# Altium PCB IP Camera v0.0.1.PcbDoc
Units mm, origin at the board's own origin, x right, y up, seen from the top; angles counter-clockwise.
Board outline 50 x 50 mm, 4 copper layers (Top Layer, Internal 1, Internal 2, Bottom Layer), stack 1.5 mm thick; 88 components, 80 nets, 410 pads, 13 vias.
Unrouted connection lines stored in the file: 194.
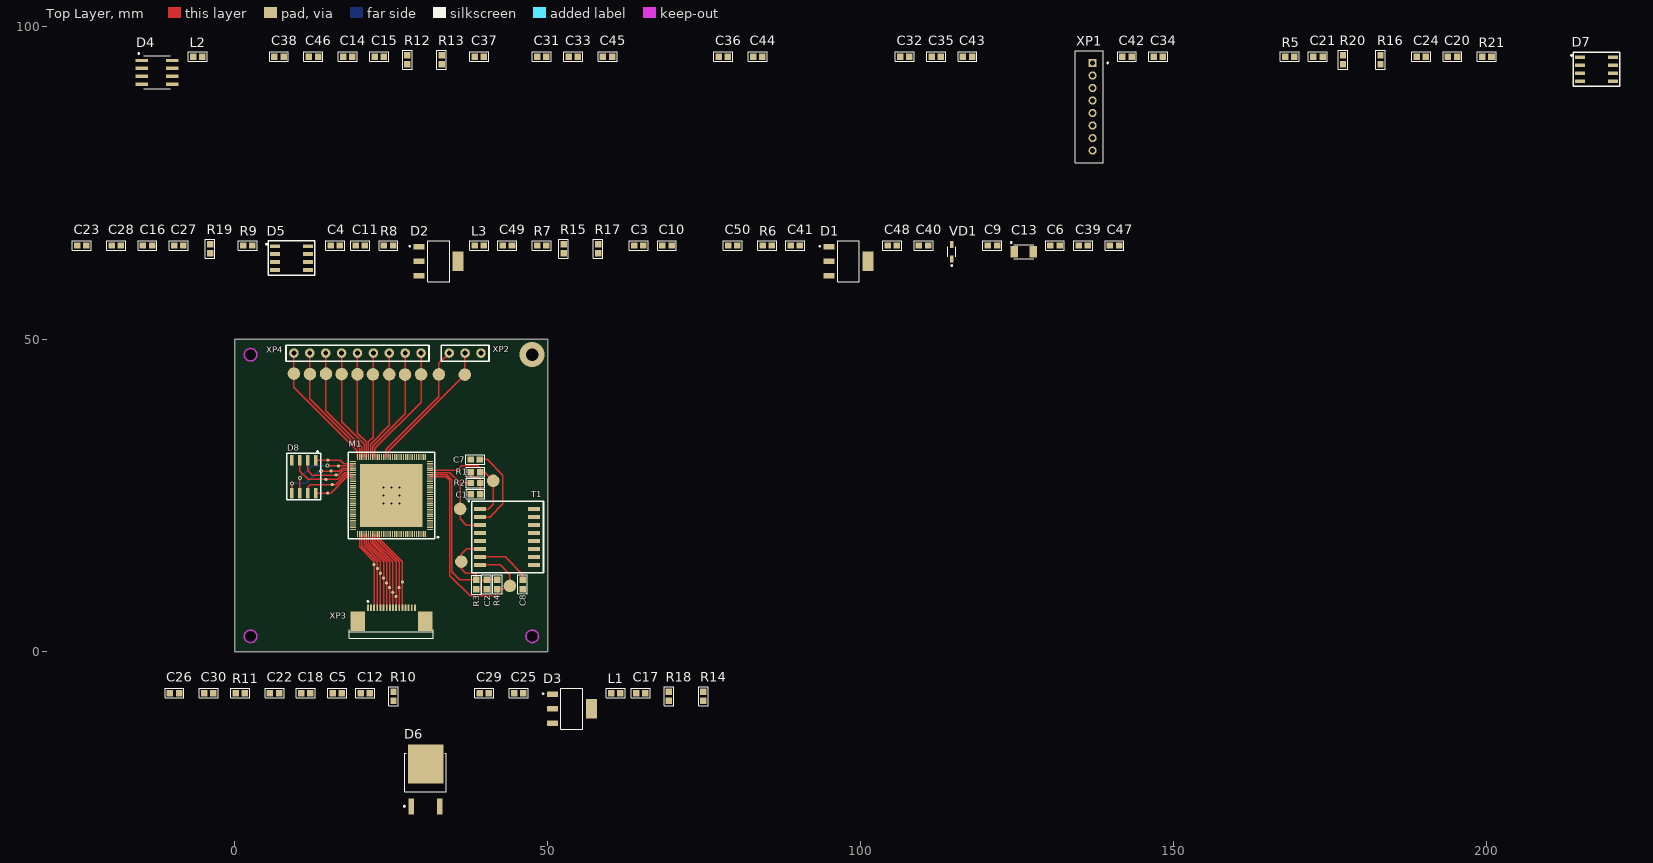
[diagram p0: Top Layer view]
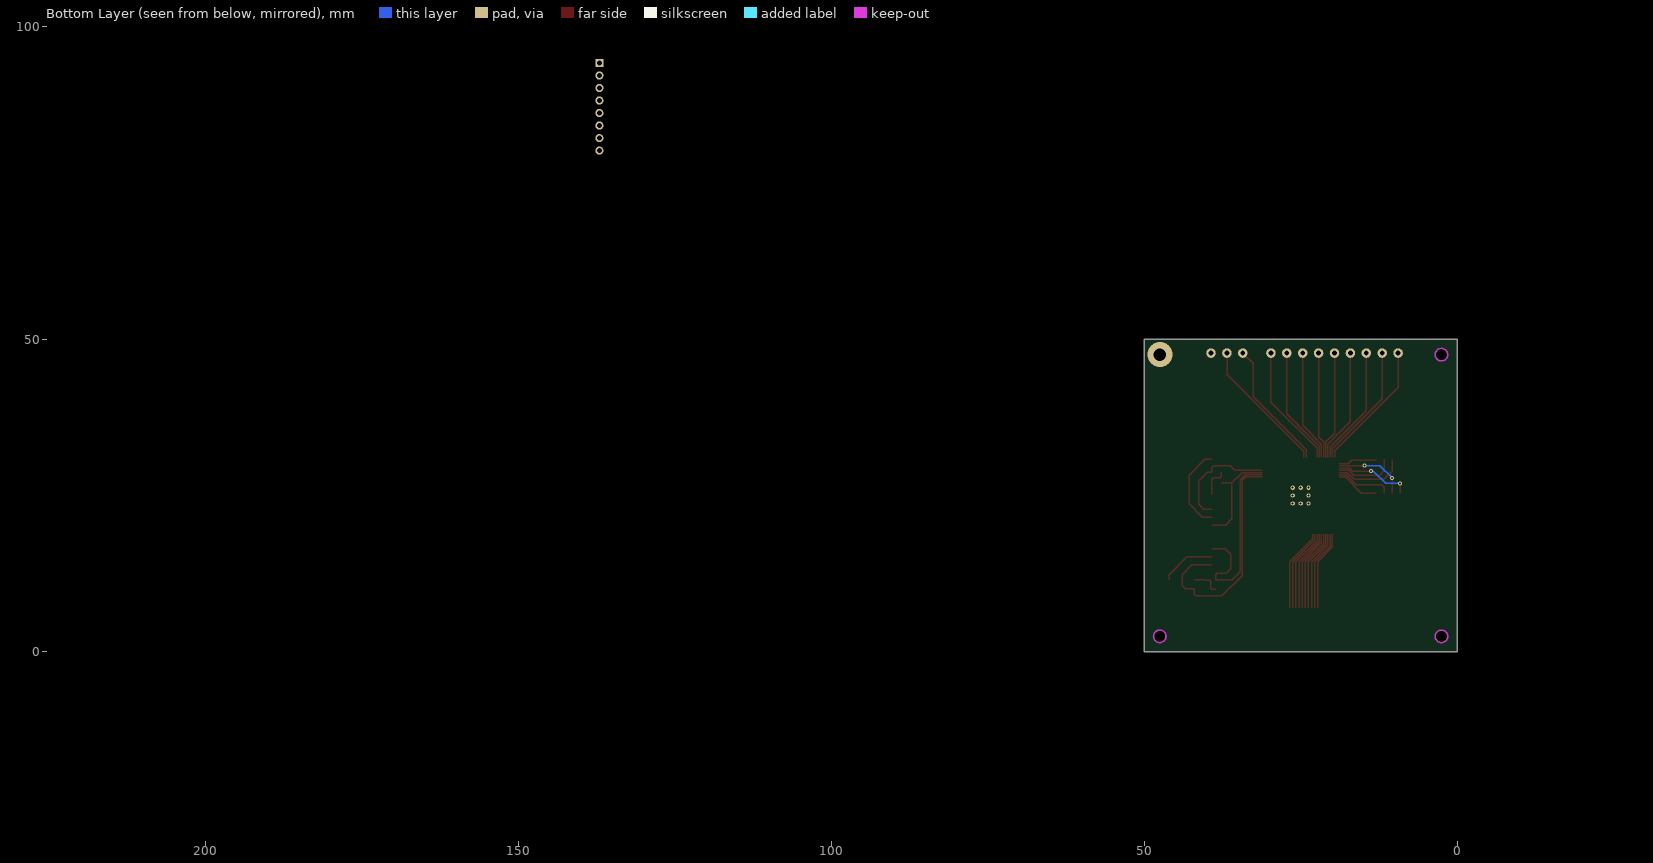
[diagram p1: Bottom Layer view, seen from below]

## Layer stack, top to bottom
Top Solder: solder mask 0.0254, SM-001, Dk 4
Top Layer: signal copper 0.035
Dielectric 1: prepreg 0.115, PP-017, Dk 4.3
Internal 1: signal copper 0.035
Dielectric 3: core 1.13, Core-039, Dk 4.8
Internal 2: signal copper 0.035
Dielectric 5: prepreg 0.115, PP-017, Dk 4.3
Bottom Layer: signal copper 0.035
Bottom Solder: solder mask 0.0254, SM-001, Dk 4

## Board outline
0,0 0,50 50,50 50,0
cut-out: 46.5,2.5 ccw(c47.5,2.5) 47.5,1.5 ccw(c47.5,2.5) 48.5,2.5 ccw(c47.5,2.5) 47.5,3.5 ccw(c47.5,2.5)
cut-out: 2.5,46.5 cw(c2.5,47.5) 1.5,47.5 cw(c2.5,47.5) 2.5,48.5 cw(c2.5,47.5) 3.5,47.5 cw(c2.5,47.5)
cut-out: 2.5,1.5 cw(c2.5,2.5) 1.5,2.5 cw(c2.5,2.5) 2.5,3.5 cw(c2.5,2.5) 3.5,2.5 cw(c2.5,2.5)

## Design rules (kind name [scope] priority, off if disabled: settings)
AcuteAngle [All] p1: minimum=3.50000000000000E+0001 checktracksonly=FALSE
BoardOutlineClearance "BoardOutlineClearance 1" [All] p1: gap=0.25 ignorepadtopadclearanceinfootprint=FALSE except(0: Arc-SplitContinuation Track-SplitContinuation SMDPad-SplitContinuation THPad-SplitContinuation Via-SplitContinuation Fill-SplitContinuation Poly-SplitContinuation Region-SplitContinuation Text-SplitContinuation) // Milling
BoardOutlineClearance "BoardOutlineClearance 2" [All] p2: gap=0.4 ignorepadtopadclearanceinfootprint=FALSE except(0: Arc-SplitContinuation Track-SplitContinuation SMDPad-SplitContinuation THPad-SplitContinuation Via-SplitContinuation Fill-SplitContinuation Poly-SplitContinuation Region-SplitContinuation Text-SplitContinuation) // V-Cut
Clearance "Clearance-2 1/2 Oz" [All] p1: gap=0.1 ignorepadtopadclearanceinfootprint=FALSE except(0.15: Arc-Fill Arc-Poly Track-Fill Track-Poly SMDPad-SMDPad SMDPad-Fill SMDPad-Poly THPad-Fill THPad-Poly Via-Fill Via-Poly Fill-Fill Fill-Poly Poly-Poly Poly-Region Poly-Text; 0.2: Track-Via Via-Via; 0.25: Arc-Hole Track-Hole SMDPad-Hole THPad-Hole Via-Hole Fill-Hole Poly-Hole Region-Hole Text-Hole) // Advance
Clearance "Clearance-1 1/2 Oz" [All] p2: gap=0.125 ignorepadtopadclearanceinfootprint=FALSE except(0.2: Arc-Fill Arc-Poly Track-Fill Track-Poly SMDPad-SMDPad SMDPad-Fill SMDPad-Poly THPad-Fill THPad-Poly Via-Fill Via-Poly Fill-Fill Fill-Poly Poly-Poly Poly-Region Poly-Text; 0.25: Arc-Hole Track-Hole SMDPad-Hole THPad-Hole Via-Hole Fill-Hole Poly-Hole Region-Hole Text-Hole) // Standart
Clearance "Clearance-1 1 Oz" [All] p3 off: gap=0.2 ignorepadtopadclearanceinfootprint=FALSE except(0.25: Arc-Hole Track-Hole SMDPad-Hole THPad-Hole Via-Hole Fill-Hole Poly-Hole Region-Hole Text-Hole) // Standart
Clearance "Clearance 3 Oz" [All] p4 off: gap=0.35 ignorepadtopadclearanceinfootprint=FALSE except(0.25: Arc-Hole Track-Hole SMDPad-Hole THPad-Hole Via-Hole Fill-Hole Poly-Hole Region-Hole Text-Hole)
Clearance "Clearance 2 Oz" [All] p5 off: gap=0.3 ignorepadtopadclearanceinfootprint=FALSE except(0.25: Arc-Hole Track-Hole SMDPad-Hole THPad-Hole Via-Hole Fill-Hole Poly-Hole Region-Hole Text-Hole)
Clearance "Clearance-2 1 Oz" [All] p6 off: gap=0.15 ignorepadtopadclearanceinfootprint=FALSE except(0.2: Arc-Fill Arc-Poly Track-Fill Track-Poly SMDPad-Fill SMDPad-Poly THPad-Fill THPad-Poly Via-Fill Via-Poly Fill-Fill Fill-Poly Poly-Poly; 0.25: Arc-Hole Track-Hole SMDPad-Hole THPad-Hole Via-Hole Fill-Hole Poly-Hole Region-Hole Text-Hole) // Advance
DiffPairsRouting "DiffPairsRouting 1 Oz" [All] p1: maxlimit=0.254 minlimit=0.2 mostfreqgap=0.254 toplayer_minwidth=0.2 toplayer_maxwidth=0.381 toplayer_prefwidth=0.381 midlayer1_minwidth=0.2 midlayer1_maxwidth=0.381 midlayer1_prefwidth=0.381 midlayer2_minwidth=0.2 midlayer2_maxwidth=0.381 midlayer2_prefwidth=0.381 bottomlayer_minwidth=0.2 bottomlayer_maxwidth=0.381 bottomlayer_prefwidth=0.381 maxuncoupledlength=12.7
DiffPairsRouting "DiffPairsRouting 1/2 Oz" [All] p2 off: maxlimit=0.254 minlimit=0.1 mostfreqgap=0.254 toplayer_minwidth=0.1 toplayer_maxwidth=0.381 toplayer_prefwidth=0.381 midlayer1_minwidth=0.1 midlayer1_maxwidth=0.381 midlayer1_prefwidth=0.381 midlayer2_minwidth=0.1 midlayer2_maxwidth=0.381 midlayer2_prefwidth=0.381 bottomlayer_minwidth=0.1 bottomlayer_maxwidth=0.381 bottomlayer_prefwidth=0.381 maxuncoupledlength=12.7
HoleSize "Minimum HoleSize" [IsPad] p1: absolutevalues=TRUE maxlimit=5.9 minlimit=0.6 maxpercent=80.000 minpercent=20.000
HoleSize "Minimum HoleSize VIA 1" [IsVia] p2: absolutevalues=TRUE maxlimit=5.9 minlimit=0.3 maxpercent=80.000 minpercent=20.000 // Standart
HoleSize "Minimum HoleSize VIA 2" [IsVia] p3: absolutevalues=TRUE maxlimit=5.9 minlimit=0.2 maxpercent=80.000 minpercent=20.000 // Advance
HoleToHoleClearance Hole2HoleClearance [All] p1: gap=0.25 allowstackedmicrovias=FALSE
MinimumAnnularRing "Minimum AR VIA Standart" [IsVia] p1: minimumring=0.15
MinimumAnnularRing "Minimum AR PAD Standart" [IsPAD] p2: minimumring=0.2
MinimumAnnularRing "Minimum AR VIA Advance" [IsVia] p3: minimumring=0.1
MinimumAnnularRing "Minimum AR PAD Advance" [IsPAD] p4: minimumring=0.15
MinimumSolderMaskSliver "SolderMask Bridge Standart" [All] p1: minsoldermaskwidth=0.15 // All Masks
MinimumSolderMaskSliver "SolderMask Bridge Advance" [All] p2: minsoldermaskwidth=0.1 // Mask LDI
PlaneClearance "PlaneClearance 3 Oz" [All] p1 off: clearance=0.35
PlaneClearance "PlaneClearance 2 Oz" [All] p2 off: clearance=0.3
PlaneClearance "PlaneClearance 1 Oz" [All] p3: clearance=0.2
PlaneClearance "PlaneClearance-1 1/2 Oz" [All] p4 off: clearance=0.2 // Standart
PlaneClearance "PlaneClearance-2 1/2 Oz" [All] p5 off: clearance=0.15 // Advance
PlaneConnect "TermalConnect 3 Oz" [All] p1 off: planeconnectstyle=Relief reliefexpansion=0.2 reliefentries=4 reliefconductorwidth=0.35 reliefairgap=0.35 // Standart
PlaneConnect "TermalConnect 2 Oz" [All] p2 off: planeconnectstyle=Relief reliefexpansion=0.2 reliefentries=4 reliefconductorwidth=0.3 reliefairgap=0.3 // Standart
PlaneConnect "TermalConnect-1 1 Oz" [All] p3: planeconnectstyle=Relief reliefexpansion=0.2 reliefentries=4 reliefconductorwidth=0.2 reliefairgap=0.2 // Standart
PlaneConnect "TermalConnect-2 1 Oz" [All] p4 off: pad.planeconnectstyle=Relief pad.reliefexpansion=0.15 pad.reliefentries=4 pad.reliefconductorwidth=0.2 pad.reliefairgap=0.2 via.planeconnectstyle=Direct via.reliefexpansion=0.15 via.reliefentries=4 via.reliefconductorwidth=0.15 via.reliefairgap=0.15 // Advance
PlaneConnect "TermalConnect-1 1/2 Oz" [All] p5 off: planeconnectstyle=Relief reliefexpansion=0.2 reliefentries=4 reliefconductorwidth=0.2 reliefairgap=0.2 // Standart
PlaneConnect "TermalConnect-2 1/2 Oz" [All] p6 off: pad.planeconnectstyle=Relief pad.reliefexpansion=0.15 pad.reliefentries=4 pad.reliefconductorwidth=0.15 pad.reliefairgap=0.15 via.planeconnectstyle=Direct via.reliefexpansion=0.15 via.reliefentries=4 via.reliefconductorwidth=0.15 via.reliefairgap=0.15 // Advance
PolygonConnect "PolygonConnect 3 Oz" [All] p1 off: thpad.connectstyle=Relief thpad.reliefconductorwidth=0.35 thpad.reliefentries=4 thpad.polygonreliefangle="90 Angle" thpad.airgapwidth=0.35 smdpad.connectstyle=Relief smdpad.reliefconductorwidth=0.35 smdpad.reliefentries=4 smdpad.polygonreliefangle="90 Angle" smdpad.airgapwidth=0.35 via.connectstyle=Direct via.reliefconductorwidth=0.254 via.reliefentries=4 via.polygonreliefangle="90 Angle" via.airgapwidth=0.254
PolygonConnect "PolygonConnect 2 Oz" [All] p2 off: thpad.connectstyle=Relief thpad.reliefconductorwidth=0.3 thpad.reliefentries=4 thpad.polygonreliefangle="90 Angle" thpad.airgapwidth=0.3 smdpad.connectstyle=Relief smdpad.reliefconductorwidth=0.3 smdpad.reliefentries=4 smdpad.polygonreliefangle="90 Angle" smdpad.airgapwidth=0.3 via.connectstyle=Direct via.reliefconductorwidth=0.254 via.reliefentries=4 via.polygonreliefangle="90 Angle" via.airgapwidth=0.254
PolygonConnect "PolygonConnect-1 1 Oz" [All] p3: thpad.connectstyle=Relief thpad.reliefconductorwidth=0.2 thpad.reliefentries=4 thpad.polygonreliefangle="90 Angle" thpad.airgapwidth=0.2 smdpad.connectstyle=Relief smdpad.reliefconductorwidth=0.2 smdpad.reliefentries=4 smdpad.polygonreliefangle="90 Angle" smdpad.airgapwidth=0.2 via.connectstyle=Direct via.reliefconductorwidth=0.254 via.reliefentries=4 via.polygonreliefangle="90 Angle" via.airgapwidth=0.254 // Standart
PolygonConnect "PolygonConnect-2 1 Oz" [All] p4 off: thpad.connectstyle=Relief thpad.reliefconductorwidth=0.15 thpad.reliefentries=4 thpad.polygonreliefangle="90 Angle" thpad.airgapwidth=0.15 smdpad.connectstyle=Relief smdpad.reliefconductorwidth=0.15 smdpad.reliefentries=4 smdpad.polygonreliefangle="90 Angle" smdpad.airgapwidth=0.15 via.connectstyle=Direct via.reliefconductorwidth=0.254 via.reliefentries=4 via.polygonreliefangle="90 Angle" via.airgapwidth=0.254 // Advance
PolygonConnect "PolygonConnect-1 1/2 Oz" [All] p5 off: thpad.connectstyle=Relief thpad.reliefconductorwidth=0.15 thpad.reliefentries=4 thpad.polygonreliefangle="90 Angle" thpad.airgapwidth=0.2 smdpad.connectstyle=Relief smdpad.reliefconductorwidth=0.2 smdpad.reliefentries=4 smdpad.polygonreliefangle="90 Angle" smdpad.airgapwidth=0.2 via.connectstyle=Direct via.reliefconductorwidth=0.254 via.reliefentries=4 via.polygonreliefangle="90 Angle" via.airgapwidth=0.254 // Standart
PolygonConnect "PolygonConnect-2 1/2 Oz" [All] p6 off: thpad.connectstyle=Relief thpad.reliefconductorwidth=0.125 thpad.reliefentries=4 thpad.polygonreliefangle="90 Angle" thpad.airgapwidth=0.15 smdpad.connectstyle=Relief smdpad.reliefconductorwidth=0.125 smdpad.reliefentries=4 smdpad.polygonreliefangle="90 Angle" smdpad.airgapwidth=0.15 via.connectstyle=Direct via.reliefconductorwidth=0.254 via.reliefentries=4 via.polygonreliefangle="90 Angle" via.airgapwidth=0.254 // Advance
RoutingCorners [All] p1 off: cornerstyle=45-Degree minsetback=2.54 maxsetback=2.54
RoutingVias [All] p1: holewidth=0.3 width=0.6 viastyle="Through Hole" minholewidth=0.2 minwidth=0.4 maxholewidth=5.9 maxwidth=6.4
SilkToSilkClearance Silk2SilkClearance [All] p1 off: silktosilkclearance=0.15
SilkToSolderMaskClearance Silk2SolderMaskClearance [IsPad] p1 off: minsilkscreentomaskgap=0.15 clearancetoexposedcopper=TRUE
SolderMaskExpansion SolderMaskExpansion-1 [All] p1: expansion=0.05 istentingtop=FALSE // Standart
SolderMaskExpansion "SolderMaskExpansion LDI" [All] p2: expansion=0.025 istentingtop=FALSE // Advance
UnRoutedNet [All] p1: checkbadconnections=TRUE
Width "Width 1/2 Oz" [All] p1 off: maxlimit=10 minlimit=0.1 preferedwidth=0.125 checkconnectedcopper=TRUE
Width "Width 1 Oz" [All] p2: maxlimit=1 minlimit=0.2 preferedwidth=0.3 checkconnectedcopper=TRUE
Width "Width 3 Oz" [All] p3 off: maxlimit=10 minlimit=0.35 preferedwidth=0.4 checkconnectedcopper=TRUE
Width "Width 2 Oz" [All] p4 off: maxlimit=10 minlimit=0.3 preferedwidth=0.35 minimp=50.000000 maximp=50.000000 favimp=50.000000 checkconnectedcopper=TRUE
20 further rules are at their usual default settings.

## Components (designator, comment, footprint, x,y, rotation, side; value= is the part's Value field where it differs from the comment)
C1 "0.01 мкФ" CAP0603 38.43,25.222 r180 top (schematic designator С1)
C2 "0.01 мкФ" CAP0603 40.234,10.795 r270 top (schematic designator С2)
C7 "1000 пФ" CAP0603 38.405,30.759 r0 top (schematic designator С7)
C8 "1000 пФ" CAP0603 45.974,10.795 r90 top (schematic designator С8)
D1 "LD1117-ADJ" SOT-223 98.036,62.441 r0 top
D2 "LD1117-ADJ" SOT-223 32.537,62.441 r0 top
D3 "LD1117-ADJ" SOT-223 53.838,-9.065 r0 top
D4 "LT1763" SOIC-8 -12.456,92.616 r0 top
D5 "G973" SOP-8 9.037,62.941 r0 top
D6 "78D05L" TO-252 30.455,-20.35 r0 top
D7 "G973" SOP-8 217.543,93.116 r0 top
D8 "FM25Q128" SOP-8 10.998,28.016 r270 top locked
L1 "FERRITE0603" FERRITE0603 60.838,-6.565 r0 top value="200 Ом"
L2 "FERRITE0603" FERRITE0603 -5.956,95.116 r0 top value="200 Ом"
L3 "FERRITE0603" FERRITE0603 39.037,64.941 r0 top value="200 Ом"
M1 "SigmaStar SSC338Q" QFN-128 25,25 r180 top locked
R1 "RES" RES0603 38.43,28.727 r180 top value="50 Ом"
R2 "RES" RES0603 38.43,27 r180 top value="50 Ом"
R3 "RES" RES0603 38.583,10.77 r270 top value="50 Ом"
R4 "RES" RES0603 41.935,10.795 r270 top value="50 Ом"
R5 "RES" RES0603 168.544,95.116 r0 top value="0 Ом"
R6 "RES" RES0603 85.036,64.941 r0 top value="125 Ом"
R7 "RES" RES0603 49.037,64.941 r0 top value="55 Ом"
R8 "RES" RES0603 24.537,64.941 r0 top value="125 Ом"
R9 "RES" RES0603 2.037,64.941 r0 top value="25 Ом"
R10 "RES" RES0603 25.338,-7.065 r90 top value="125 Ом"
R11 "RES" RES0603 0.838,-6.565 r0 top value="164 Ом"
R12 "RES" RES0603 27.544,94.616 r90 top value="75 Ом"
R13 "RES" RES0603 33.044,94.616 r90 top value="75 Ом"
R14 "RES" RES0603 74.838,-7.065 r90 top value="10 кОм"
R15 "RES" RES0603 52.537,64.441 r90 top value="1.5 кОм"
R16 "RES" RES0603 183.044,94.616 r90 top value="10 кОм"
R17 "RES" RES0603 58.037,64.441 r90 top value="1.5 кОм"
R18 "RES" RES0603 69.338,-7.065 r90 top value="100 кОм"
R19 "RES" RES0603 -3.963,64.441 r90 top value="12.5 кОм"
R20 "RES" RES0603 177.044,94.616 r90 top value="100 кОм"
R21 "RES" RES0603 200.043,95.116 r0 top value="37.5 кОм"
T1 "B78476A8065A3" SOP-16 39.141,22.809 r270 top
VD1 "BZX384C12" SOD-323 114.536,63.941 r90 top
XP1 "J1" JST-B8B-PH 137.044,87.116 r90 top
XP2 "J2" J2 34.239,47.752 r0 top locked
XP3 "FFC_FPC 16pin" "FFC_FPC 16pin" 25,6 r0 top locked
XP4 "J4" J4 11.963,47.752 r0 top locked
С3 "0.1 мкФ" CAP0603 64.537,64.941 r0 top
С4 "0.1 мкФ" CAP0603 16.037,64.941 r0 top
С5 "0.1 мкФ" CAP0603 16.338,-6.565 r0 top
С6 "1 мкФ" CAP0603 131.036,64.941 r0 top
С9 "1 мкФ" CAP0603 121.036,64.941 r0 top
С10 "10 мкФ" CAP0603 69.037,64.941 r0 top
С11 "10 мкФ" CAP0603 20.037,64.941 r0 top
С12 "10 мкФ" CAP0603 20.838,-6.565 r0 top
С13 "10 мкФ" "TANTAL A" 126.036,63.941 r0 top
С14 "1000 пФ" CAP0603 18.044,95.116 r0 top
С15 "1000 пФ" CAP0603 23.044,95.116 r0 top
С16 "1 мкФ" CAP0603 -13.963,64.941 r0 top
С17 "20 мкФ" CAP0603 64.838,-6.565 r0 top
С18 "0.33 мкФ" CAP0603 11.338,-6.565 r0 top
С20 "1 мкФ" CAP0603 194.544,95.116 r0 top
С21 "20 мкФ" CAP0603 173.044,95.116 r0 top
С22 "0.1 мкФ" CAP0603 6.338,-6.565 r0 top
С23 "20 мкФ" CAP0603 -24.463,64.941 r0 top
С24 "20 мкФ" CAP0603 189.544,95.116 r0 top
С25 "0.1 мкФ" CAP0603 45.338,-6.565 r0 top
С26 "0.1 мкФ" CAP0603 -9.662,-6.565 r0 top
С27 "0.1 мкФ" CAP0603 -8.963,64.941 r0 top
С28 "0.1 мкФ" CAP0603 -18.963,64.941 r0 top
С29 "0.1 мкФ" CAP0603 39.838,-6.565 r0 top
С30 "0.1 мкФ" CAP0603 -4.162,-6.565 r0 top
С31 "20 пФ" CAP0603 49.044,95.116 r0 top
С32 "1 мкФ" CAP0603 107.044,95.116 r0 top
С33 "20 пФ" CAP0603 54.044,95.116 r0 top
С34 "0.1 мкФ" CAP0603 147.544,95.116 r0 top
С35 "0.1 мкФ" CAP0603 112.044,95.116 r0 top
С36 "0.1 мкФ" CAP0603 78.044,95.116 r0 top
С37 "0.1 мкФ" CAP0603 39.044,95.116 r0 top
С38 "0.1 мкФ" CAP0603 7.044,95.116 r0 top
С39 "0.1 мкФ" CAP0603 135.536,64.941 r0 top
С40 "0.1 мкФ" CAP0603 110.036,64.941 r0 top
С41 "0.1 мкФ" CAP0603 89.536,64.941 r0 top
С42 "0.1 мкФ" CAP0603 142.544,95.116 r0 top
С43 "0.1 мкФ" CAP0603 117.044,95.116 r0 top
С44 "0.1 мкФ" CAP0603 83.544,95.116 r0 top
С45 "0.1 мкФ" CAP0603 59.544,95.116 r0 top
С46 "0.1 мкФ" CAP0603 12.544,95.116 r0 top
С47 "0.1 мкФ" CAP0603 140.536,64.941 r0 top
С48 "0.1 мкФ" CAP0603 105.036,64.941 r0 top
С49 "0.1 мкФ" CAP0603 43.537,64.941 r0 top
С50 "0.1 мкФ" CAP0603 79.536,64.941 r0 top

## Footprints (in the part's own frame and the unit in brackets; to place one, negate y for a bottom-side part, rotate by r counter-clockwise, add the part's x,y. Pads: shape width x height; smd on the part's side, far side on the other; paste and mask are expansions set on the pad)
CAP0603 [mm]
  rect 1.04x1.02 smd: 1(-0.735,0) 2(0.735,0)
  silkscreen extent -1.51,-0.76 1.51,0.76, body extent -0.8,-0.38 0.8,0.43, height 0.8
FERRITE0603 [mm]
  rect 1.04x1.02 smd: 1(-0.735,0) 2(0.735,0)
  silkscreen extent -1.51,-0.76 1.51,0.76, body extent -0.8,-0.4 0.8,0.4, height 0.8
"FFC_FPC 16pin" [mm]
  rect 0.3x1.1 smd: 1(-3.75,1.075) 2(-3.25,1.075) 3(-2.75,1.075) 4(-2.25,1.075) 5(-1.75,1.075) 6(-1.25,1.075) 7(-0.75,1.075) 8(-0.25,1.075) 9(0.25,1.075) 10(0.75,1.075) 11(1.25,1.075) 12(1.75,1.075) 13(2.25,1.075) 14(2.75,1.075) 15(3.25,1.075) 16(3.75,1.075)
  rect 2.3x3.1 smd: S1(-5.4,-1.075) S2(5.4,-1.075)
  silkscreen extent -6.72,-3.82 6.72,2.17, body extent -6.2,-5.52 6.2,1.24, height 2
J2 [mil]
  round 60 hole 30: 1(0,0) 2(100,0) 3(200,0)
  silkscreen extent -50,-50 250,50
J4 [mil]
  round 60 hole 30: 1(-100,0) 2(0,0) 3(100,0) 4(200,0) 5(300,0) 6(400,0) 7(500,0) 8(600,0) 9(700,0)
  silkscreen extent -150,-50 750,50
JST-B8B-PH [mm]
  rect 1.308x1.308 / inner round 1.308 / far side rect 1.308x1.308 hole 0.8: 1(7,0)
  round 1.308 hole 0.8: 2(5,0) 3(3,0) 4(1,0) 5(-1,0) 6(-3,0) 7(-5,0) 8(-7,0)
  silkscreen extent -8.95,-2.5 8.95,2.8, body extent -8.98,-1.65 8.92,2.85, height 6
QFN-128 [mm]
  rect 1x0.2 smd mask+0.01: 1(-6.15,5.425) 2(-6.15,5.075) 3(-6.15,4.725) 4(-6.15,4.375) 5(-6.15,4.025) 6(-6.15,3.675) 7(-6.15,3.325) 8(-6.15,2.975) 9(-6.15,2.625) 10(-6.15,2.275) 11(-6.15,1.925) 12(-6.15,1.575) 13(-6.15,1.225) 14(-6.15,0.875) 15(-6.15,0.525) 16(-6.15,0.175) 17(-6.15,-0.175) 18(-6.15,-0.525) 19(-6.15,-0.875) 20(-6.15,-1.225) 21(-6.15,-1.575) 22(-6.15,-1.925) 23(-6.15,-2.275) 24(-6.15,-2.625) 25(-6.15,-2.975) 26(-6.15,-3.325) 27(-6.15,-3.675) 28(-6.15,-4.025) 29(-6.15,-4.375) 30(-6.15,-4.725) 31(-6.15,-5.075) 32(-6.15,-5.425) 65(6.15,-5.425) 66(6.15,-5.075) 67(6.15,-4.725) 68(6.15,-4.375) 69(6.15,-4.025) 70(6.15,-3.675) 71(6.15,-3.325) 72(6.15,-2.975) 73(6.15,-2.625) 74(6.15,-2.275) 75(6.15,-1.925) 76(6.15,-1.575) 77(6.15,-1.225) 78(6.15,-0.875) 79(6.15,-0.525) 80(6.15,-0.175) 81(6.15,0.175) 82(6.15,0.525) 83(6.15,0.875) 84(6.15,1.225) 85(6.15,1.575) 86(6.15,1.925) 87(6.15,2.275) 88(6.15,2.625) 89(6.15,2.975) 90(6.15,3.325) 91(6.15,3.675) 92(6.15,4.025) 93(6.15,4.375) 94(6.15,4.725) 95(6.15,5.075) 96(6.15,5.425)
  rect 0.2x1 smd mask+0.01: 33(-5.425,-6.15) 34(-5.075,-6.15) 35(-4.725,-6.15) 36(-4.375,-6.15) 37(-4.025,-6.15) 38(-3.675,-6.15) 39(-3.325,-6.15) 40(-2.975,-6.15) 41(-2.625,-6.15) 42(-2.275,-6.15) 43(-1.925,-6.15) 44(-1.575,-6.15) 45(-1.225,-6.15) 46(-0.875,-6.15) 47(-0.525,-6.15) 48(-0.175,-6.15) 49(0.175,-6.15) 50(0.525,-6.15) 51(0.875,-6.15) 52(1.225,-6.15) 53(1.575,-6.15) 54(1.925,-6.15) 55(2.275,-6.15) 56(2.625,-6.15) 57(2.975,-6.15) 58(3.325,-6.15) 59(3.675,-6.15) 60(4.025,-6.15) 61(4.375,-6.15) 62(4.725,-6.15) 63(5.075,-6.15) 64(5.425,-6.15) 97(5.425,6.15) 98(5.075,6.15) 99(4.725,6.15) 100(4.375,6.15) 101(4.025,6.15) 102(3.675,6.15) 103(3.325,6.15) 104(2.975,6.15) 105(2.625,6.15) 106(2.275,6.15) 107(1.925,6.15) 108(1.575,6.15) 109(1.225,6.15) 110(0.875,6.15) 111(0.525,6.15) 112(0.175,6.15) 113(-0.175,6.15) 114(-0.525,6.15) 115(-0.875,6.15) 116(-1.225,6.15) 117(-1.575,6.15) 118(-1.925,6.15) 119(-2.275,6.15) 120(-2.625,6.15) 121(-2.975,6.15) 122(-3.325,6.15) 123(-3.675,6.15) 124(-4.025,6.15) 125(-4.375,6.15) 126(-4.725,6.15) 127(-5.075,6.15) 128(-5.425,6.15)
  rect 10x10 smd: 129(0,0)
  silkscreen extent -7.54,-6.9 6.93,6.9
RES0603 [mm]
  rect 1.04x1.02 smd: 1(-0.735,0) 2(0.735,0)
  silkscreen extent -1.51,-0.76 1.51,0.76, body extent -0.8,-0.42 0.84,0.43, height 0.46
SOD-323 [mm]
  rect 1.11x0.52 smd: 1(1.165,0) 2(-1.165,0)
  silkscreen extent -2.3,-0.62 0.82,0.62, body extent -1.3,-0.65 1.2,0.65, height 1.2
SOIC-8 [mil]
  rect 78x21 smd: 1(-97,75) 2(-97,25) 3(-97,-25) 4(-97,-75) 5(97,-75) 6(97,-25) 7(97,25) 8(97,75)
  silkscreen extent -118,-104 84,122, body extent -118,-96 118,97, height 69
SOP-8 [mm]
  rect 1.64x0.59 smd: 1(-2.635,1.905) 2(-2.635,0.635) 3(-2.635,-0.635) 4(-2.635,-1.905) 5(2.635,-1.905) 6(2.635,-0.635) 7(2.635,0.635) 8(2.635,1.905)
  silkscreen extent -4.1,-2.74 3.7,2.74, body extent -3,-2.46 3,2.46, height 1.73
SOP-16 [mm]
  rect 0.64x1.905 smd: 1(0,0) 2(1.27,0) 3(2.54,0) 4(3.81,0) 5(5.08,0) 6(6.35,0) 7(7.62,0) 8(8.89,0) 9(8.89,8.636) 10(7.62,8.636) 11(6.35,8.636) 12(5.08,8.636) 13(3.81,8.636) 14(2.54,8.636) 15(1.27,8.636) 16(0,8.636)
  silkscreen extent -1.37,-1.88 10.16,10.16, body extent -0.65,0.36 9.55,8.28, height 2
SOT-223 [mm]
  rect 1.76x0.88 smd: 1(-3.125,2.3) 2(-3.125,0) 3(-3.125,-2.3)
  rect 1.76x3.14 smd: 4(3.125,0)
  silkscreen extent -4.7,-3.25 1.75,3.25, body extent -3.48,-3.25 3.48,3.25, height 1.7
"TANTAL A" [mm]
  rect 1.2x1.82 smd: 1(-1.505,0) 2(1.505,0)
  silkscreen extent -2.1,-1.09 1.63,1.6, body extent -1.6,-0.8 1.6,0.8, height 1.8
TO-252 [mm]
  rect 0.94x2.52 smd: 1(-2.28,-4.34) 3(2.28,-4.34)
  rect 5.67x6.23 smd paste-4: 2(0,2.48)
  silkscreen extent -3.52,-4.42 3.33,4.2, body extent -3.25,-5.03 3.25,4.95, height 2.55

## Part data
C1 C2 C7 C8: library part CAP_CERAMIC, Voltage="20 В"
VD1: library part "Shottky diode"
XP3: library part "J3 CAM"
С3 С4 С5 С6 С9 С10 С11 С12 С16 С17 С18 С20 С21 С22 С23 С24 С25 С26 С27 С28 С29 С30 С31 С32 С33 С34 С35 С36 С37 С38 С39 С40 С41 С42 С43 С44 С45 С46 С47 С48 С49 С50: library part CAP_CERAMIC, Voltage="10 В"
С13: library part CAP_TANTALUM, Power="10 В"
С14 С15: library part CAP_CERAMIC, Voltage="2000 В"

## Free pads (board coordinates)
  round 2 smd: 25(43.942,10.566) 26(36.17,14.427) 27(35.992,22.86) 28(41.275,27.356) 50(36.728,44.323) 51(32.588,44.348) 56(29.743,44.348) 57(27.178,44.323) 58(24.663,44.348) 59(22.047,44.348) 60(19.583,44.374) 61(17.043,44.399) 62(14.554,44.45) 63(11.989,44.399) 64(9.423,44.475)
  round 0.5 smd: 66(14.85,30.651) 67(16.535,29.718) 68(15.367,28.931) 69(16.18,28.296) 70(14.554,27.584) 71(15.545,26.746) 72(14.808,25.375) 98(22.225,13.97) 99(22.758,13.335) 100(23.241,12.573) 101(23.749,11.811) 102(24.232,11.024) 103(24.714,10.287) 104(25.222,9.525) 105(25.73,8.89) 106(26.238,10.287) 107(26.746,11.176)

## Via types
v1: diameter 0.7, hole 0.3, Top Layer to Bottom Layer, 8 vias
v2: diameter 0.6, hole 0.3, Top Layer to Bottom Layer, tented both sides, 4 vias
v3: diameter 4, hole 2, Top Layer to Bottom Layer, 1 vias

## Nets (pads, with @x,y where several pads share a name; then routed paths per layer and width w, separated by ;. In a path a pad name is that pad's centre, name@x,y a point inside that pad or via, vN(x,y) a via of type N, cw(c..) or ccw(c..) an arc to the next point about the centre after c; other vN are vias at no path point)
"+1.1 В": D7.3 D7.4 R21.2 XP3.15 С24.1
"+1.8 В": D1.2 D1.4 R6.2 XP3.14 С10.1
"+2.9 В": D3.2 D3.4 L1.1 R10.2 С12.1
"+5 В": D5.6 D5.8 D6.3 D7.6 D7.8 С16.1 С20.1 С22.1
"+12 В": D4.5 D4.8 D6.1 VD1.2 XP1.8 С6.1 С18.1
AGND: R5.1 С34.2 С35.2 С36.2 С37.2 С42.2 С43.2 С44.2 С45.2 С49.2
  other v3: 47.5,47.5
AVDD_3P3USB: D8.8 L2.2 M1.29 M1.42 M1.65 M1.72 M1.116 pad.72 С34.1 С42.1 С43.1 С44.1 С45.1 | length 7
  Top Layer w0.2: D8.8 15.272,25.381 17.866,27.975 M1.72
AVDD_ETH: M1.24 С35.1
AVDD_RTC: L1.2 M1.84 XP3.13 С36.1
AVDDIO_DRAM_40: L3.2 M1.40 M1.49 С37.1 С49.1
CLK_N: M1.107 pad.107 XP3.12 | length 13.3
  Top Layer w0.2: M1.107 23.075,18.083 26.75,14.408 26.75,9.119 XP3.12
CLK_P: M1.106 pad.106 XP3.11 | length 13.2
  Top Layer w0.2: M1.106 22.725,17.938 26.25,14.413 26.25,9.779 XP3.11
DATA2_N: M1.101 pad.101 XP3.6 | length 12.9
  Top Layer w0.2: M1.101 20.975,17.213 23.75,14.438 23.75,10.287 XP3.6
DATA2_P: M1.100 pad.100 XP3.5 | length 12.9
  Top Layer w0.2: M1.100 20.625,17.068 23.25,14.443 23.25,9.779 XP3.5
DATA3_N: M1.103 pad.103 XP3.8 | length 13.1
  Top Layer w0.2: M1.103 21.675,17.503 24.74,14.438 24.74,10.185 pad.103 ; XP3.8 pad.103@24.75,10.16
DATA3_P: M1.102 pad.102 XP3.7 | length 13
  Top Layer w0.2: M1.102 21.325,17.358 24.25,14.433 24.25,10.795 XP3.7
DATA4_N: M1.105 pad.105 XP3.10 | length 13.2
  Top Layer w0.2: M1.105 22.375,17.793 25.75,14.418 25.75,10.287 XP3.10
DATA4_P: M1.104 pad.104 XP3.9 | length 13.1
  Top Layer w0.2: M1.104 22.025,17.648 25.25,14.423 25.25,10.795 XP3.9
DATA_N: M1.99 pad.99 XP3.4 | length 12.8
  Top Layer w0.2: M1.99 20.275,16.923 22.75,14.448 22.75,9.144 XP3.4
DATA_P: M1.98 pad.98 XP3.3 | length 12.7
  Top Layer w0.2: M1.98 19.925,16.778 22.25,14.453 22.25,8.611 XP3.3
DEBUG_RX: M1.50 pad.50 XP2.2 | length 21.7
  Top Layer w0.2: M1.50 24.475,32.07 33.045,40.64 33.05,40.64 36.733,44.323 36.733,47.706 XP2.2
DEBUG_TX: M1.51 pad.51 XP2.1 | length 20.8
  Top Layer w0.2: M1.51 24.125,32.278 32.588,40.742 32.588,46.101 XP2.1
DVDD_DDR: D5.3 D5.4 M1.23 M1.44 M1.45 M1.47 M1.87 M1.88 M1.96 M1.115 M1.120 R19.2 С23.1 С25.1 С28.1 С29.1 С30.1 С46.1 С47.1 С48.1 С50.1
ETH_LED0: M1.21 XP1.2
ETH_LED1: M1.22 XP1.1
ETH_RD+: M1.26 pad.26 R3.1 T1.6 | length 32.3
  Top Layer w0.2: M1.26 33.854,28.325 34.646,27.534 34.646,12.802 35.943,11.505 R3.1 38.583,12.319 38.329,12.573 36.855,12.573 36.17,13.259 pad.26 36.17,15.596 37.033,16.459 T1.6
ETH_RD-: M1.25 pad.25 R4.2 T1.8 | length 38
  Top Layer w0.2: M1.25 33.78,27.975 34.346,27.409 34.346,12.213 37.567,8.992 41.707,8.992 41.961,9.246 R4.2@41.961,10.035 ; T1.8 42.393,13.919 43.942,12.37 pad.25 43.466,10.091 42.017,10.091 R4.2@41.961,10.035 ; R4.2 R4.2@41.961,10.035
ETH_RX+: T1.11 XP1.5
ETH_RX-: T1.9 XP1.6
ETH_TD+: M1.28 pad.28 R1.1 T1.1 | length 18.1
  Top Layer w0.2: M1.28 35.502,29.025 36.271,29.794 38.837,29.794 39.165,29.466 R1.1 39.903,28.727 pad.28 41.275,23.597 40.488,22.809 T1.1
ETH_TD-: M1.27 pad.27 R2.2 T1.3 | length 16.5
  Top Layer w0.2: M1.27 34.317,28.675 35.992,27 ; R2.2 35.992,27 ; T1.3 36.982,20.269 35.992,21.26 pad.27 35.992,27
ETH_TX+: T1.16 XP1.3
ETH_TX-: T1.14 XP1.4
FLASH_CLK: D8.6 M1.67 pad.67 | length 11.8
  Top Layer w0.2: D8.6 10.376,25.394 10.376,27.8 v2(10.389,27.813) ; v2(14.808,29.794) 14.877,29.725 M1.67
  Bottom Layer w0.2: v2(10.389,27.813) 12.37,29.794 v2(14.808,29.794)
FLASH_CS: D8.1 M1.66 pad.66 | length 6.2
  Top Layer w0.2: D8.1 16.796,30.651 17.372,30.075 M1.66
FLASH_DI: D8.5 M1.68 pad.68 | length 12.3
  Top Layer w0.2: D8.5 9.106,25.394 9.106,26.911 v2(9.119,26.924) ; v2(13.767,28.905) 16.688,28.905 17.158,29.375 M1.68
  Bottom Layer w0.2: v2(9.119,26.924) 11.379,26.924 13.36,28.905 v2(13.767,28.905)
FLASH_DO: D8.2 M1.69 pad.69 | length 9.6
  Top Layer w0.2: D8.2@11.633,30.759 D8.2 11.633,29.007 12.37,28.27 16.535,28.27 17.29,29.025 M1.69
FLASH_HOLD: D8.7 M1.71 pad.71 | length 9
  Top Layer w0.2: D8.7 11.633,26.34 12.04,26.746 16.104,26.746 17.682,28.325 M1.71
FLASH_WP: D8.3 M1.70 pad.70 | length 11.3
  Top Layer w0.2: D8.3@10.363,30.683 D8.3 10.363,28.905 11.684,27.584 16.459,27.584 17.55,28.675 M1.70
GND: C1.2 C2.2 C7.1 C8.1 D4.3 D4.6 D4.7 D5.1 D6.2 D7.1 D8.4 M1.129 R5.2 R7.1 R9.1 R11.1 R18.2 R20.2 VD1.1 XP1.7 XP2.3 XP3.16 XP3.S1 XP3.S2 С3.2 С4.2 С5.2 С6.2 С10.2 С11.2 С12.2 С13.2 С14.2 С15.2 С16.2 С17.2 С18.2 С20.2 С21.2 С22.2 С23.2 С24.2 С25.2 С26.2 С27.2 С28.2 С29.2 С30.2 С31.2 С32.2 С33.2 С38.2 С39.2 С40.2 С41.2 С46.2 С47.2 С48.2 С50.2
  other v1: 23.73,23.73 25,23.73 26.27,23.73 23.73,25 26.27,25 23.73,26.27 25,26.27 26.27,26.27
GPIO8: M1.121
GPIO9: M1.122
GPIO12: M1.123
GPIO13: M1.124
GPIO14: M1.125
GPIO15: M1.126
I2C_SCL: M1.54 R17.2 XP3.1
I2C_SDA: M1.55 R15.2 XP3.2
NetD1_1: D1.1 R6.1 R7.2
NetD2_1: D2.1 R8.1 R9.2
NetD3_1: D3.1 R10.1 R11.2
NetD4_4: D4.4 С9.2
NetD5_2: D5.2 R18.1 R19.1
NetD5_7: D5.7 R14.1
NetD7_2: D7.2 R20.1 R21.1
NetD7_7: D7.7 R16.1
NetM1_43: M1.43
NetM1_73: M1.73 С32.1
NetM1_85: M1.85 С33.1
NetM1_86: M1.86 С31.1
NetR1_2: C1.1 R1.2 R2.1 | length 4.7
  Top Layer w0.2: R1.2 37.694,28.726 37.694,28.042 37.897,27.838 38.964,27.838 39.167,27.635 39.167,27.002 R2.1 C1.1
NetR3_2: C2.1 R3.2 R4.1 | length 4.6
  Top Layer w0.2: R3.2 38.584,10.033 39.218,10.033 39.395,10.211 39.395,11.338 39.513,11.455 40.159,11.455 C2.1 R4.1
NetR12_1: R12.1 T1.15
NetR12_2: R12.2 С14.1
NetR13_1: R13.1 T1.10
NetR13_2: R13.2 С15.1
NetT1_2: C7.2 T1.2 | length 13.8
  Top Layer w0.2: C7.2 40.284,30.759 42.799,28.245 42.799,23.647 40.691,21.539 T1.2
NetT1_7: C8.2 T1.7 | length 8.8
  Top Layer w0.2: T1.7 43.155,15.189 45.974,12.37 C8.2
PM_GPIO0: M1.56 pad.56 XP4.9 | length 19.7
  Top Layer w0.2: M1.56 22.375,32.56 29.743,39.929 XP4.9
PM_GPIO1: M1.57 pad.57 XP4.8 | length 18.7
  Top Layer w0.2: M1.57 22.025,32.896 27.203,38.075 XP4.8
PM_GPIO2: M1.58 pad.58 XP4.7 | length 17.8
  Top Layer w0.2: M1.58 21.675,33.207 24.663,36.195 XP4.7
PM_GPIO3: M1.59 pad.59 XP4.6 | length 16.9
  Top Layer w0.2: M1.59 21.325,33.568 22.073,34.315 22.073,47.701 XP4.6
PM_GPIO4: M1.60 pad.60 XP4.5 | length 17.2
  Top Layer w0.2: XP4.5 19.583,34.95 20.975,33.559 M1.60
PM_GPIO5: M1.61 pad.61 XP4.4 | length 18.1
  Top Layer w0.2: XP4.4 17.043,36.779 20.625,33.198 M1.61
PM_GPIO6: M1.62 pad.62 XP4.3 | length 19
  Top Layer w0.2: XP4.3 14.503,38.583 20.275,32.811 M1.62
PM_GPIO7: M1.63 pad.63 XP4.2 | length 19.9
  Top Layer w0.2: XP4.2 11.963,40.437 19.925,32.475 M1.63
PM_GPIO8: M1.64 pad.64 XP4.1 | length 20.8
  Top Layer w0.2: XP4.1 9.423,42.316 19.575,32.165 M1.64
VDD_IO: R15.1 R17.1
VDDIO_DATA_41: D2.2 D2.4 D5.5 D7.5 L3.1 M1.41 M1.46 M1.48 R8.2 R14.2 R16.2 С11.1 С17.1 С21.1 С26.1 С27.1 С41.1
VDDP_0: D1.3 D2.3 D3.3 D4.1 D4.2 L2.1 M1.89 M1.97 M1.127 С3.1 С4.1 С5.1 С9.1 С13.1 С38.1 С39.1 С40.1
pads on no net: M1.1 M1.2 M1.3 M1.4 M1.5 M1.6 M1.7 M1.8 M1.9 M1.10 M1.11 M1.12 M1.13 M1.14 M1.15 M1.16 M1.17 M1.18 M1.19 M1.20 M1.30 M1.31 M1.32 M1.33 M1.34 M1.35 M1.36 M1.37 M1.38 M1.39 M1.52 M1.53 M1.74 M1.75 M1.76 M1.77 M1.78 M1.79 M1.80 M1.81 M1.82 M1.83 M1.90 M1.91 M1.92 M1.93 M1.94 M1.95 M1.108 M1.109 M1.110 M1.111 M1.112 M1.113 M1.114 M1.117 M1.118 M1.119 M1.128 T1.4 T1.5 T1.12 T1.13

## Keep-outs
Keep-Out Layer:
  circle w0.254: c47.5,2.5 r1
  circle w0.254: c2.5,2.5 r1
  circle w0.254: c2.5,47.5 r1

## Silkscreen, mask and mechanical layers (free items; w line width, h text height)
Mechanical 1:
  the board outline again, w0.254